# Altium PCB Transmitter.PcbDoc (part 2 of 2)
Units mm, origin at the board's own origin, x right, y up, seen from the top; angles counter-clockwise.
Board outline 94.9 x 125.8 mm, 2 copper layers (Top Layer, Bottom Layer); 250 components, 166 nets, 771 pads, 77 vias.
Unrouted connection lines stored in the file: 2.
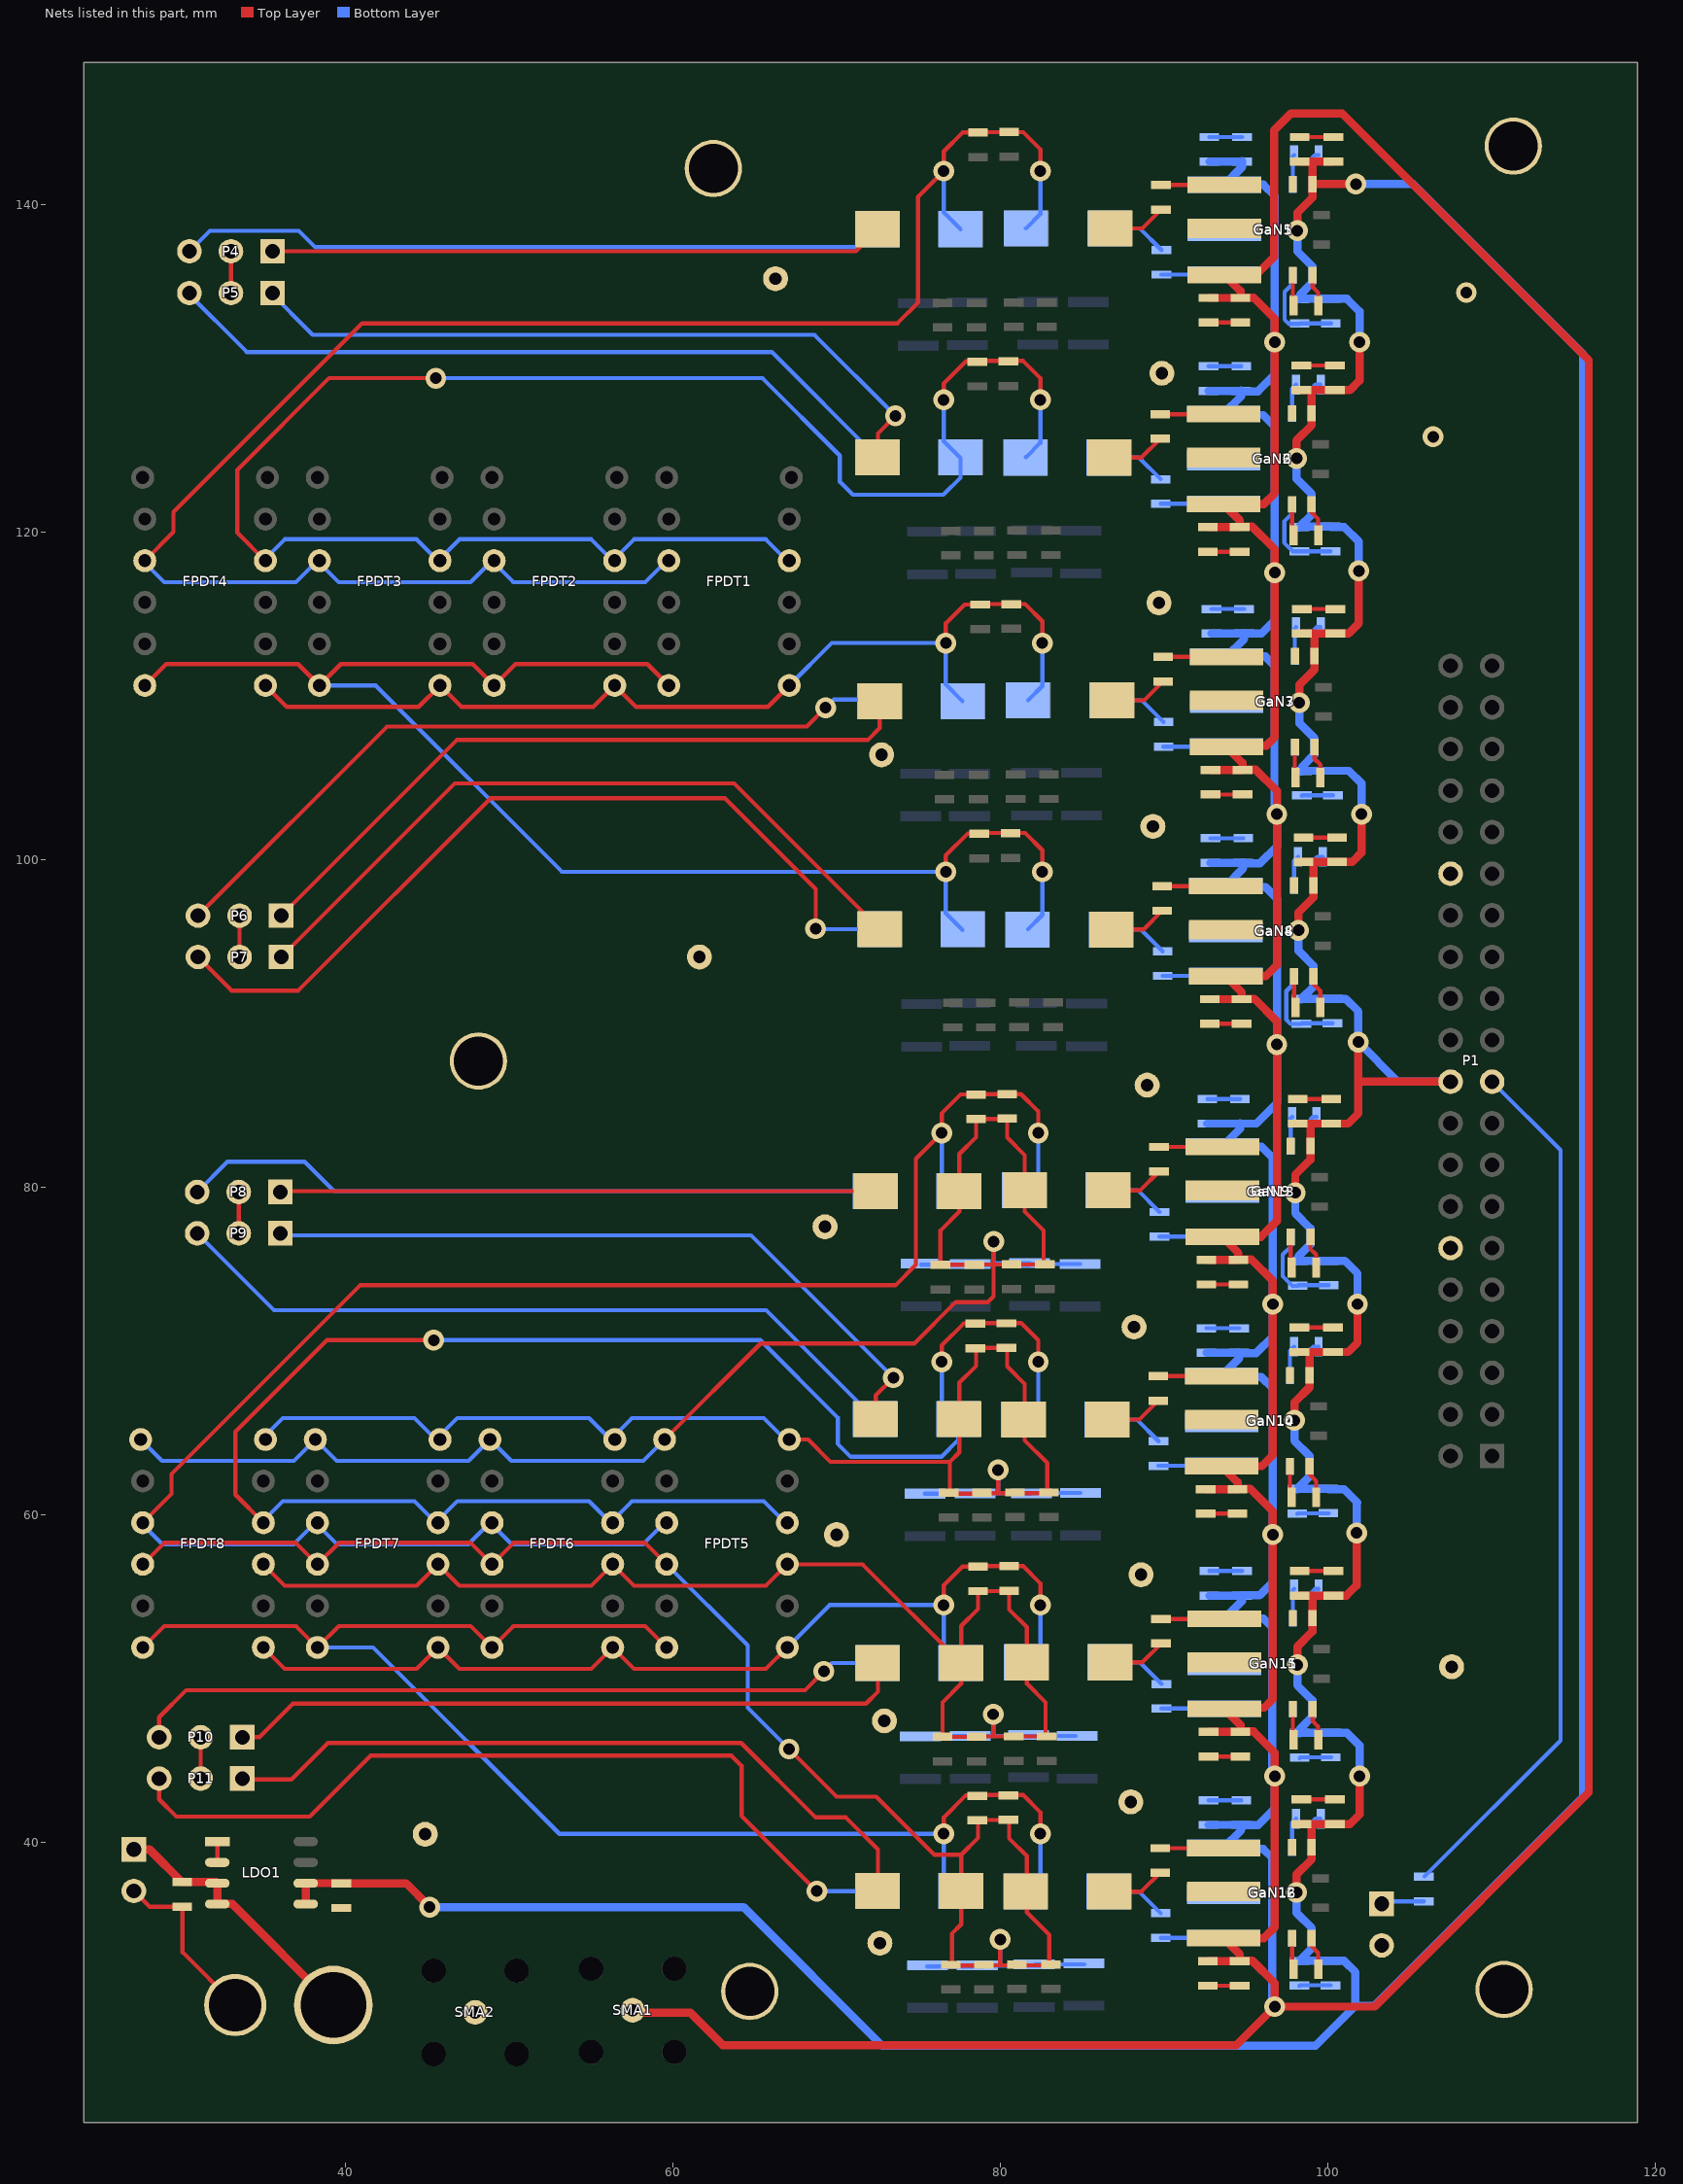
[diagram p2: the nets of this part, all layers, seen from the top]

## Via types
v1: diameter 1.27, hole 0.711, Top Layer to Bottom Layer, 77 vias

## Nets (pads, with @x,y where several pads share a name; then routed paths per layer and width w, separated by ;. In a path a pad name is that pad's centre, name@x,y a point inside that pad or via, vN(x,y) a via of type N, cw(c..) or ccw(c..) an arc to the next point about the centre after c; other vN are vias at no path point) (continued)
E5: Ca21.2 Ca22.2 Ca23.2 Ca24.2 Ca25.2 Cf21.2 Cf22.2 Cf23.2 Cf24.2 Cf25.2 FPDT5.1 FPDT6.1 FPDT7.1 FPDT8.1 L17.2 L18.1 | length 102.2
  Top Layer w0.254: FPDT5.1@59.473,64.582 65.341,70.45 74.725,70.45 77.25,72.975 79.225,72.975 79.575,73.325 79.575,75.275 ; L18.1@77.6,79.875 L18.1@77.475,79.75 ; Cf23.2@78.4,75.25 Ca23.2@76.325,75.25 76.325,77.35 77.475,78.5 L18.1@77.475,79.75 ; Cf23.2@78.85,75.275 79.575,75.275 ; v1(79.575,76.675) 79.575,75.275 ; Ca22.2@80.675,75.275 Cf22.2@82.625,75.275 ; Ca22.2@80.85,75.275 79.575,75.275 ; Cf22.2@82.7,75.275 Cf22.2@82.625,75.275 ; L18.1@77.475,79.75 77.475,82.025 78.5,83.05 Cf21.2@78.5,84.15 80.375,84.15 Ca21.2@80.4,84.175 80.4,83.025 81.475,81.95 L17.2@81.475,79.8 81.475,78.5 82.625,77.35 Cf22.2@82.625,75.275
  Bottom Layer w0.254: FPDT8.1@27.469,64.582 28.776,63.275 36.83,63.275 FPDT7.1@38.137,64.582 39.444,63.275 47.498,63.275 FPDT6.1@48.805,64.582 50.112,63.275 58.166,63.275 FPDT5.1@59.473,64.582 ; Cf25.2@75.15,75.25 78.349,75.25 Ca25.2@78.359,75.24 ; Ca25.2@78.934,75.24 79.575,75.24 ; v1(79.575,76.675) 79.575,75.24 ; Cf24.2@80.84,75.24 80.69,75.24 Cf24.2@80.7,75.25 ; Cf24.2@81.775,75.35 Cf24.2@80.8,75.35 ; Cf24.2@82.625,75.25 Cf24.2@82.65,75.275 ; Ca24.2@84.85,75.3 81.825,75.3 81.775,75.25 Cf24.2@80.7,75.25 ; 79.575,75.24 79.685,75.35 Cf24.2@80.8,75.35 ; Cf24.2@80.7,75.25 Cf24.2@80.8,75.35
E6: Ca26.2 Ca27.2 Ca28.2 Ca29.2 Ca30.2 Cf26.2 Cf27.2 Cf28.2 Cf29.2 Cf30.2 FPDT5.12 FPDT6.12 FPDT7.12 FPDT8.12 L19.2 L20.1 | length 87.4
  Top Layer w0.254: FPDT5.12@67.093,64.582 68.243,64.582 69.6,63.225 76.9,63.225 ; L20.1@77.475,65.825 L20.1@77.6,65.95 ; L20.1@77.6,65.9 L20.1@77.475,65.775 ; Cf27.2@78.85,61.3 79.85,61.3 ; Cf27.2@78.975,61.275 76.9,61.275 76.9,63.225 ; v1(79.85,62.725) 79.85,61.3 ; Ca28.2@80.825,61.3 82.85,61.3 82.85,63.15 81.475,64.525 81.475,67.975 80.4,69.05 80.4,70.2 80.375,70.175 78.5,70.175 78.5,69.075 77.475,68.05 L20.1@77.475,65.775 ; Ca28.2@80.85,61.3 79.85,61.3 ; 76.9,63.225 77.475,63.8 L20.1@77.475,65.775
  Bottom Layer w0.254: FPDT8.12@34.835,64.582 36.142,65.889 44.196,65.889 45.503,64.582 46.81,65.889 54.864,65.889 56.171,64.582 57.478,65.889 65.532,65.889 FPDT5.12@66.839,64.582 ; Cf30.2@75.375,61.275 Ca30.2@78.45,61.275 ; Ca30.2@78.934,61.265 78.924,61.275 Ca30.2@78.45,61.275 ; v1(79.85,62.725) 79.85,61.3 ; Cf29.2@80.84,61.265 80.85,61.275 81.875,61.275 81.925,61.325 Ca29.2@84.875,61.325 ; Cf29.2@81.875,61.3 79.85,61.3 ; Cf29.2@82.775,61.275 Cf29.2@82.8,61.3 ; Ca30.2@78.45,61.275 78.475,61.3 79.85,61.3
E7: Ca31.2 Ca32.2 Ca33.2 Ca34.2 Ca35.2 Cf31.2 Cf32.2 Cf33.2 Cf34.2 Cf35.2 FPDT5.9 FPDT6.9 FPDT7.9 FPDT8.9 L21.2 L22.1 | length 87.4
  Top Layer w0.254: FPDT8.9@34.962,56.962 36.269,55.655 44.323,55.655 FPDT7.9@45.63,56.962 46.937,55.655 54.991,55.655 FPDT6.9@56.298,56.962 57.605,55.655 65.659,55.655 FPDT5.9@66.966,56.962 71.563,56.962 L22.1@77.6,50.925 ; L22.1@77.725,51.05 L22.1@77.6,50.925 ; Cf33.2@78.525,46.425 Ca33.2@76.45,46.425 76.45,48.525 77.6,49.675 L22.1@77.6,50.925 ; Cf33.2@78.975,46.45 79.55,46.45 ; v1(79.55,47.8) 79.55,46.45 ; Ca32.2@80.8,46.45 Cf32.2@82.75,46.45 ; Ca32.2@80.975,46.45 79.55,46.45 ; Cf32.2@82.825,46.45 Cf32.2@82.75,46.45 ; L22.1@77.6,50.925 77.6,53.2 78.625,54.225 Cf31.2@78.625,55.325 80.5,55.325 Ca31.2@80.525,55.35 80.525,54.2 81.6,53.125 L21.2@81.6,50.975 81.6,49.675 82.75,48.525 Cf32.2@82.75,46.45
  Bottom Layer w0.254: Cf34.2@76.15,46.375 76.25,46.475 79.562,46.475 ; v1(79.55,47.8) 79.55,46.487 79.562,46.475 ; 79.562,46.45 79.562,46.475 ; Ca35.2@84.575,46.475 79.562,46.475
E8: Ca36.2 Ca37.2 Ca38.2 Ca39.2 Ca40.2 Cf36.2 Cf37.2 Cf38.2 Cf39.2 Cf40.2 FPDT5.4 FPDT6.4 FPDT7.4 FPDT8.4 L23.2 L24.1 | length 104.3
  Top Layer w0.254: FPDT8.4@27.596,56.962 28.903,58.269 36.957,58.269 FPDT7.4@38.264,56.962 39.571,58.269 47.625,58.269 FPDT6.4@48.932,56.962 50.239,58.269 58.293,58.269 FPDT5.4@59.6,56.962 ; v1(67.075,45.675) 69.975,42.775 72.4,42.775 75.95,39.225 77.6,39.225 ; L24.1@77.725,37.075 77.6,36.95 77.6,34.975 77.025,34.4 77.025,32.45 Cf37.2@79.1,32.45 ; L24.1@77.725,37.125 L24.1@77.6,37 77.6,39.225 ; Cf37.2@78.975,32.475 79.975,32.475 ; v1(79.975,34.05) 79.975,32.475 ; Ca38.2@80.95,32.475 82.975,32.475 82.975,34.325 81.6,35.7 81.6,39.15 80.525,40.225 80.525,41.375 80.5,41.35 78.625,41.35 78.625,40.25 77.6,39.225 ; Ca38.2@80.975,32.475 79.975,32.475
  Bottom Layer w0.254: FPDT5.4@59.6,56.962 64.55,52.012 64.55,48.2 v1(67.075,45.675) ; Cf39.2@75.525,32.4 78.875,32.4 Ca39.2@78.9,32.425 ; Ca39.2@79.059,32.44 80.012,32.44 ; v1(79.975,34.05) 79.975,32.477 80.012,32.44 ; Cf40.2@80.9,32.45 Cf40.2@82.05,32.45 ; Cf40.2@80.965,32.44 80.012,32.44 ; Cf40.2@82.974,32.45 Cf40.2@82.05,32.45 ; Ca40.2@85.1,32.525 82.125,32.525 Cf40.2@82.05,32.45
F1: Ca1.1 Cf1.1 FPDT1.3 FPDT2.3 FPDT3.3 FPDT4.3 L9.2 L10.1 | length 115.6
  Top Layer w0.254: FPDT4.3@27.721,118.252 29.475,120.006 29.475,121.225 41,132.75 73.7,132.75 74.95,134 74.95,140.475 v1(76.525,142.05) 76.525,143.25 77.675,144.4 Cf1.1@78.625,144.4 ; Cf1.1@78.625,144.425 Ca1.1@80.525,144.425 81.375,144.425 82.425,143.375 v1(82.425,142.05)
  Bottom Layer w0.254: FPDT4.3@27.594,118.252 28.901,116.945 36.955,116.945 38.262,118.252 39.569,116.945 47.623,116.945 48.93,118.252 50.237,116.945 58.291,116.945 FPDT1.3@59.598,118.252 ; v1(76.525,142.05) 76.525,139.525 L10.1@77.55,138.5 ; L9.2@81.55,138.55 82.425,139.425 v1(82.425,142.05)
F2: Ca6.1 Cf6.1 FPDT1.10 FPDT2.10 FPDT3.10 FPDT4.10 L11.2 L12.1 | length 110.6
  Top Layer w0.254: FPDT4.10@35.087,118.252 33.375,119.964 33.375,123.8 38.975,129.4 v1(45.5,129.4) ; v1(76.525,128.075) 76.525,129.075 77.875,130.425 Cf6.1@78.625,130.425 ; Cf6.1@78.625,130.45 81.375,130.45 82.425,129.4 v1(82.425,128.075)
  Bottom Layer w0.254: FPDT4.10@34.96,118.252 36.267,119.559 44.321,119.559 45.628,118.252 46.935,119.559 54.989,119.559 56.296,118.252 57.603,119.559 65.657,119.559 FPDT1.10@66.964,118.252 ; v1(45.5,129.4) 65.45,129.4 70.175,124.675 70.175,123.075 70.975,122.275 76.5,122.275 77.55,123.325 77.55,124.525 76.525,125.55 v1(76.525,128.075) ; L11.2@81.55,124.575 82.425,125.45 v1(82.425,128.075)
F3: Ca11.1 Cf11.1 FPDT1.7 FPDT2.7 FPDT3.7 FPDT4.7 L13.2 L14.1 | length 63.1
  Top Layer w0.254: FPDT4.7@35.087,110.632 36.394,109.325 44.448,109.325 FPDT3.7@45.755,110.632 47.062,109.325 55.116,109.325 FPDT2.7@56.423,110.632 57.73,109.325 65.784,109.325 FPDT1.7@67.091,110.632 ; v1(76.65,113.225) 76.65,114.425 77.8,115.575 Cf11.1@78.75,115.575 ; Cf11.1@78.75,115.6 Ca11.1@80.65,115.6 81.5,115.6 82.55,114.55 v1(82.55,113.225)
  Bottom Layer w0.254: FPDT1.7@67.091,110.632 69.684,113.225 v1(76.65,113.225) 76.65,110.7 L14.1@77.675,109.675 ; L13.2@81.675,109.725 82.55,110.6 v1(82.55,113.225)
F4: Ca16.1 Cf16.1 FPDT1.6 FPDT2.6 FPDT3.6 FPDT4.6 L15.2 L16.1 | length 95.3
  Top Layer w0.254: FPDT4.6@27.721,110.632 29.028,111.939 37.082,111.939 FPDT3.6@38.389,110.632 39.696,111.939 47.75,111.939 FPDT2.6@49.057,110.632 50.364,111.939 58.418,111.939 FPDT1.6@59.725,110.632 ; v1(76.65,99.25) 76.65,100.25 78,101.6 Cf16.1@78.75,101.6 ; Cf16.1@78.75,101.625 81.5,101.625 82.55,100.575 v1(82.55,99.25)
  Bottom Layer w0.254: FPDT3.6@38.389,110.632 41.825,110.632 53.207,99.25 v1(76.65,99.25) 76.65,96.725 L16.1@77.675,95.7 ; L15.2@81.675,95.75 82.55,96.625 v1(82.55,99.25)
F5: Ca21.1 Cf21.1 FPDT5.3 FPDT6.3 FPDT7.3 FPDT8.3 L25.2 L26.1 | length 115.6
  Top Layer w0.254: FPDT8.3@27.596,59.502 29.35,61.256 29.35,62.475 40.875,74 73.575,74 74.825,75.25 74.825,81.725 v1(76.4,83.3) 76.4,84.5 77.55,85.65 Cf21.1@78.5,85.65 ; Cf21.1@78.5,85.675 Ca21.1@80.4,85.675 81.25,85.675 82.3,84.625 v1(82.3,83.3)
  Bottom Layer w0.254: FPDT8.3@27.469,59.502 28.776,58.195 36.83,58.195 38.137,59.502 39.444,58.195 47.498,58.195 48.805,59.502 50.112,58.195 58.166,58.195 FPDT5.3@59.473,59.502 ; v1(76.4,83.3) 76.4,80.775 L26.1@77.425,79.75 ; L25.2@81.425,79.8 82.3,80.675 v1(82.3,83.3)
F6: Ca26.1 Cf26.1 FPDT5.10 FPDT6.10 FPDT7.10 FPDT8.10 L27.2 L28.1 | length 110.6
  Top Layer w0.254: FPDT8.10@34.962,59.502 33.25,61.214 33.25,65.05 38.85,70.65 v1(45.375,70.65) ; v1(76.4,69.325) 76.4,70.325 77.75,71.675 Cf26.1@78.5,71.675 ; Cf26.1@78.5,71.7 81.25,71.7 82.3,70.65 v1(82.3,69.325)
  Bottom Layer w0.254: FPDT8.10@34.835,59.502 36.142,60.809 44.196,60.809 45.503,59.502 46.81,60.809 54.864,60.809 56.171,59.502 57.478,60.809 65.532,60.809 FPDT5.10@66.839,59.502 ; v1(45.375,70.65) 65.325,70.65 70.05,65.925 70.05,64.325 70.85,63.525 76.375,63.525 77.425,64.575 77.425,65.775 76.4,66.8 v1(76.4,69.325) ; L27.2@81.425,65.825 82.3,66.7 v1(82.3,69.325)
F7: Ca31.1 Cf31.1 FPDT5.7 FPDT6.7 FPDT7.7 FPDT8.7 L29.2 L30.1 | length 63.1
  Top Layer w0.254: FPDT8.7@34.962,51.882 36.269,50.575 44.323,50.575 FPDT7.7@45.63,51.882 46.937,50.575 54.991,50.575 FPDT6.7@56.298,51.882 57.605,50.575 65.659,50.575 FPDT5.7@66.966,51.882 ; v1(76.525,54.475) 76.525,55.675 77.675,56.825 Cf31.1@78.625,56.825 ; Cf31.1@78.625,56.85 Ca31.1@80.525,56.85 81.375,56.85 82.425,55.8 v1(82.425,54.475)
  Bottom Layer w0.254: FPDT5.7@66.966,51.882 69.559,54.475 v1(76.525,54.475) 76.525,51.95 L30.1@77.55,50.925 ; L29.2@81.55,50.975 82.425,51.85 v1(82.425,54.475)
F8: Ca36.1 Cf36.1 FPDT5.6 FPDT6.6 FPDT7.6 FPDT8.6 L31.2 L32.1 | length 95.3
  Top Layer w0.254: FPDT8.6@27.596,51.882 28.903,53.189 36.957,53.189 FPDT7.6@38.264,51.882 39.571,53.189 47.625,53.189 FPDT6.6@48.932,51.882 50.239,53.189 58.293,53.189 FPDT5.6@59.6,51.882 ; v1(76.525,40.5) 76.525,41.5 77.875,42.85 Cf36.1@78.625,42.85 ; Cf36.1@78.625,42.875 81.375,42.875 82.425,41.825 v1(82.425,40.5)
  Bottom Layer w0.254: FPDT7.6@38.264,51.882 41.668,51.882 53.05,40.5 v1(76.525,40.5) 76.525,37.975 L32.1@77.55,36.95 ; L31.2@81.55,37 82.425,37.875 v1(82.425,40.5)
GND: C1.2 C2.2 C7.1 C8.2 C9.1 C10.1 C11.1 C12.2 C13.1 C14.1 C15.1 C16.2 C17.1 C18.1 C19.1 C20.2 C21.1 C22.1 C27.1 C28.2 C29.1 C30.1 C31.1 C32.2 C33.1 C34.1 C35.1 C36.2 C37.1 C38.1 C39.1 C40.2 C41.1 C42.1 C47.1 C48.2 C49.1 C50.1 C51.1 C52.2 C53.1 C54.1 C55.1 C56.2 C57.1 C58.1 C59.1 C60.2 C61.1 C62.1 C67.1 C68.2 C69.1 C70.1 C71.1 C72.2 C73.1 C74.1 C75.1 C76.2 C77.1 C78.1 C79.1 C80.2 C81.1 C82.1 D1.2 GaN1.7 GaN1.9 GaN2.7 GaN2.9 GaN3.7 GaN3.9 GaN4.7 GaN4.9 GaN5.7 GaN5.9 GaN6.7 GaN6.9 GaN7.7 GaN7.9 GaN8.7 GaN8.9 GaN9.7 GaN9.9 GaN10.7 GaN10.9 GaN11.7 GaN11.9 GaN12.7 GaN12.9 GaN13.7 GaN13.9 GaN14.7 GaN14.9 GaN15.7 GaN15.9 GaN16.7 GaN16.9 LDO1.1 LDO1.2 P1.12 P1.30 P2.2 P3.2 P4.2 P5.2 P6.2 P7.2 P8.2 P9.2 P10.2 P11.2 pad.0 pad.1 pad.2 pad.3 pad.4 pad.5 pad.6 pad.7 pad.8 pad.9 pad.10 pad.11 pad.12 pad.13 pad.14 pad.15 SMA2.1 | length 100.6
  Top Layer w0.254: P3.2@27.05,37.01 28.01,36.05 C1.2@30,36.05 30.025,36.025 30.025,33.265 P2.2@33.243,30.047 ; P11.2@31.135,43.875 P10.2@31.135,46.4 ; LDO1.2@32.15,38.755 LDO1.1@32.15,40.025 ; P5.2@32.985,134.6 P4.2@32.985,137.15 ; P9.2@33.46,77.175 P8.2@33.46,79.7 ; P7.2@33.51,94.05 P6.2@33.51,96.575 ; C53.1@92.525,60.05 C54.1@94.475,60.05 ; C49.1@92.575,74.05 C50.1@94.525,74.05 ; C61.1@92.65,31.225 C62.1@94.6,31.225 ; C13.1@92.65,118.8 C14.1@94.6,118.8 ; C57.1@92.7,45.225 C58.1@94.65,45.225 ; C9.1@92.7,132.8 C10.1@94.65,132.8 ; C21.1@92.775,89.975 C22.1@94.725,89.975 ; C17.1@92.825,103.975 C18.1@94.775,103.975 ; C48.2@98.15,85.375 C47.1@100.2,85.375 ; C52.2@98.25,71.425 C51.1@100.3,71.425 ; C56.2@98.275,56.55 C55.1@100.325,56.55 ; C8.2@98.275,144.125 C7.1@100.325,144.125 ; C60.2@98.375,42.6 C59.1@100.425,42.6 ; C12.2@98.375,130.175 C11.1@100.425,130.175 ; C16.2@98.4,115.3 C15.1@100.45,115.3 ; C20.2@98.5,101.35 C19.1@100.55,101.35
  Bottom Layer w0.254: C73.1@92.575,71.375 C74.1@94.575,71.375 ; C69.1@92.625,85.375 C70.1@94.625,85.375 ; C81.1@92.7,42.55 C82.1@94.7,42.55 ; C33.1@92.7,130.125 C34.1@94.7,130.125 ; C29.1@92.75,144.125 C30.1@94.75,144.125 ; C77.1@92.75,56.55 C78.1@94.75,56.55 ; C41.1@92.825,101.3 C42.1@94.825,101.3 ; C37.1@92.875,115.3 C38.1@94.875,115.3 ; GaN13.7@97.725,76.925 97.725,76.375 97.225,75.875 97.225,74.56 97.823,73.962 98.148,73.962 98.186,74 C67.1@100.05,74 ; GaN6.7@97.8,121.675 97.8,121.129 97.325,120.654 97.325,119.35 97.85,118.825 C31.1@100.15,118.825 ; GaN5.7@97.85,135.675 97.85,135.172 97.35,134.672 97.35,132.975 97.613,132.712 98.273,132.712 98.311,132.75 C27.1@100.175,132.75 ; GaN8.7@97.925,92.85 97.925,92.438 97.45,91.963 97.45,90.225 97.713,89.962 98.373,89.962 98.411,90 C39.1@100.275,90 ; C72.2@98.123,60.037 98.161,60.075 C71.1@100.025,60.075 ; C80.2@98.248,31.212 98.286,31.25 C79.1@100.15,31.25 ; C76.2@98.273,45.137 98.311,45.175 C75.1@100.175,45.175 ; C36.2@98.398,103.887 98.436,103.925 C35.1@100.3,103.925
  other v1: 106.425,125.825 108.45,134.625
LED: P1.19 R1.1 | length 53.7
  Bottom Layer w0.254: R1.1@105.9,37.9 114.2,46.2 114.2,82.26 P1.19@110.025,86.435
NetC3_1: C3.1 GaN1.2 | length 1.9
  Top Layer w0.254: GaN1.2@97.85,135.7 97.85,133.875 C3.1@97.9,133.825
NetC3_2: C3.2 GaN1.3 | length 2
  Top Layer w0.254: GaN1.3@99.05,135.7 99.05,134.975 99.4,134.625 C3.2@99.4,133.825
NetC4_1: C4.1 GaN2.2 | length 1.9
  Top Layer w0.254: GaN2.2@97.8,121.7 97.8,119.9 C4.1@97.9,119.8
NetC4_2: C4.2 GaN2.3 | length 2.1
  Top Layer w0.254: GaN2.3@99,121.7 99,121.2 99.4,120.8 C4.2@99.4,119.8
NetC5_1: C5.1 GaN3.2 | length 1.9
  Top Layer w0.254: GaN3.2@97.975,106.875 97.975,105.05 C5.1@98.025,105
NetC5_2: C5.2 GaN3.3 | length 2
  Top Layer w0.254: GaN3.3@99.175,106.875 99.175,106.15 99.525,105.8 C5.2@99.525,105
NetC6_1: C6.1 GaN4.2 | length 1.9
  Top Layer w0.254: GaN4.2@97.925,92.875 97.925,91.075 C6.1@98.025,90.975
NetC6_2: C6.2 GaN4.3 | length 2.1
  Top Layer w0.254: GaN4.3@99.125,92.875 99.125,92.375 99.525,91.975 C6.2@99.525,90.975
NetC23_1: C23.1 GaN5.2 | length 1.8
  Bottom Layer w0.254: GaN5.2@97.85,141.225 97.85,142.95 C23.1@97.925,143.025
NetC23_2: C23.2 GaN5.3 | length 2.1
  Bottom Layer w0.254: GaN5.3@99.05,141.225 99.05,142.875 99.2,143.025 C23.2@99.425,143.025
NetC24_1: C24.1 GaN6.2 | length 1.9
  Bottom Layer w0.254: GaN6.2@97.8,127.225 97.8,128.75 C24.1@98.05,129
NetC24_2: C24.2 GaN6.3 | length 2.2
  Bottom Layer w0.254: GaN6.3@99,127.225 99,128.775 99.225,129 C24.2@99.55,129
NetC25_1: C25.1 GaN7.2 | length 1.8
  Bottom Layer w0.254: GaN7.2@97.975,112.4 97.975,114.125 C25.1@98.05,114.2
NetC25_2: C25.2 GaN7.3 | length 2.1
  Bottom Layer w0.254: GaN7.3@99.175,112.4 99.175,114.05 99.325,114.2 C25.2@99.55,114.2
NetC26_1: C26.1 GaN8.2 | length 1.9
  Bottom Layer w0.254: GaN8.2@97.925,98.4 97.925,99.925 C26.1@98.175,100.175
NetC26_2: C26.2 GaN8.3 | length 2.2
  Bottom Layer w0.254: GaN8.3@99.125,98.4 99.125,99.95 99.35,100.175 C26.2@99.675,100.175
NetC43_1: C43.1 GaN9.2 | length 1.9
  Top Layer w0.254: GaN9.2@97.725,76.95 97.725,75.125 C43.1@97.775,75.075
NetC43_2: C43.2 GaN9.3 | length 2
  Top Layer w0.254: GaN9.3@98.925,76.95 98.925,76.225 99.275,75.875 C43.2@99.275,75.075
NetC44_1: C44.1 GaN10.2 | length 1.9
  Top Layer w0.254: GaN10.2@97.675,62.95 97.675,61.15 C44.1@97.775,61.05
NetC44_2: C44.2 GaN10.3 | length 2.1
  Top Layer w0.254: GaN10.3@98.875,62.95 98.875,62.45 99.275,62.05 C44.2@99.275,61.05
NetC45_1: C45.1 GaN11.2 | length 1.9
  Top Layer w0.254: GaN11.2@97.85,48.125 97.85,46.3 C45.1@97.9,46.25
NetC45_2: C45.2 GaN11.3 | length 2
  Top Layer w0.254: GaN11.3@99.05,48.125 99.05,47.4 99.4,47.05 C45.2@99.4,46.25
NetC46_1: C46.1 GaN12.2 | length 1.9
  Top Layer w0.254: GaN12.2@97.8,34.125 97.8,32.325 C46.1@97.9,32.225
NetC46_2: C46.2 GaN12.3 | length 2.1
  Top Layer w0.254: GaN12.3@99,34.125 99,33.625 99.4,33.225 C46.2@99.4,32.225
NetC63_1: C63.1 GaN13.2 | length 1.8
  Bottom Layer w0.254: GaN13.2@97.725,82.475 97.725,84.2 C63.1@97.8,84.275
NetC63_2: C63.2 GaN13.3 | length 2.1
  Bottom Layer w0.254: GaN13.3@98.925,82.475 98.925,84.125 99.075,84.275 C63.2@99.3,84.275
NetC64_1: C64.1 GaN14.2 | length 1.9
  Bottom Layer w0.254: GaN14.2@97.675,68.475 97.675,70 C64.1@97.925,70.25
NetC64_2: C64.2 GaN14.3 | length 2.2
  Bottom Layer w0.254: GaN14.3@98.875,68.475 98.875,70.025 99.1,70.25 C64.2@99.425,70.25
NetC65_1: C65.1 GaN15.2 | length 1.8
  Bottom Layer w0.254: GaN15.2@97.85,53.65 97.85,55.375 C65.1@97.925,55.45
NetC65_2: C65.2 GaN15.3 | length 2.1
  Bottom Layer w0.254: GaN15.3@99.05,53.65 99.05,55.3 99.2,55.45 C65.2@99.425,55.45
NetC66_1: C66.1 GaN16.2 | length 1.9
  Bottom Layer w0.254: GaN16.2@97.8,39.65 97.8,41.175 C66.1@98.05,41.425
NetC66_2: C66.2 GaN16.3 | length 2.2
  Bottom Layer w0.254: GaN16.3@99,39.65 99,41.2 99.225,41.425 C66.2@99.55,41.425
NetD1_1: D1.1 R1.2 | length 2.6
  Bottom Layer w0.254: D1.1@103.275,36.225 103.425,36.375 R1.2@105.85,36.375
NetGaN1_8: GaN1.8 R2.1 | length 3.9
  Top Layer w0.254: R2.1@89.8,141.2 GaN1.8@93.675,141.2
NetGaN2_8: GaN2.8 R3.1 | length 3.9
  Top Layer w0.254: R3.1@89.75,127.2 GaN2.8@93.625,127.2
NetGaN3_8: GaN3.8 R4.1 | length 3.9
  Top Layer w0.254: R4.1@89.925,112.375 GaN3.8@93.8,112.375
NetGaN4_8: GaN4.8 R5.1 | length 3.9
  Top Layer w0.254: R5.1@89.875,98.375 GaN4.8@93.75,98.375
NetGaN5_8: GaN5.8 R6.1 | length 3.9
  Bottom Layer w0.254: R6.1@89.825,135.725 GaN5.8@93.675,135.725
NetGaN6_8: GaN6.8 R7.1 | length 3.9
  Bottom Layer w0.254: R7.1@89.775,121.725 GaN6.8@93.625,121.725
NetGaN7_8: GaN7.8 R8.1 | length 3.9
  Bottom Layer w0.254: R8.1@89.95,106.9 GaN7.8@93.8,106.9
NetGaN8_8: GaN8.8 R9.1 | length 3.9
  Bottom Layer w0.254: R9.1@89.9,92.9 GaN8.8@93.75,92.9
NetGaN9_8: GaN9.8 R10.1 | length 3.9
  Top Layer w0.254: R10.1@89.675,82.45 GaN9.8@93.55,82.45
NetGaN10_8: GaN10.8 R11.1 | length 3.9
  Top Layer w0.254: R11.1@89.625,68.45 GaN10.8@93.5,68.45
NetGaN11_8: GaN11.8 R12.1 | length 3.9
  Top Layer w0.254: R12.1@89.8,53.625 GaN11.8@93.675,53.625
NetGaN12_8: GaN12.8 R13.1 | length 3.9
  Top Layer w0.254: R13.1@89.75,39.625 GaN12.8@93.625,39.625
NetGaN13_8: GaN13.8 R14.1 | length 3.9
  Bottom Layer w0.254: R14.1@89.7,76.975 GaN13.8@93.55,76.975
NetGaN14_8: GaN14.8 R15.1 | length 3.9
  Bottom Layer w0.254: R15.1@89.65,62.975 GaN14.8@93.5,62.975
NetGaN15_8: GaN15.8 R16.1 | length 3.9
  Bottom Layer w0.254: R16.1@89.825,48.15 GaN15.8@93.675,48.15
NetGaN16_8: GaN16.8 R17.1 | length 3.9
  Bottom Layer w0.254: R17.1@89.775,34.15 GaN16.8@93.625,34.15
NetL1_1: L1.1 R2.2 | length 3.6
  Top Layer w0.254: L1.1@86.7,138.55 88.65,138.55 R2.2@89.8,139.7
NetL2_2: L2.2 P4.1 | length 37.5
  Top Layer w0.254: P4.1@35.525,137.15 71.15,137.15 L2.2@72.5,138.5
NetL3_1: L3.1 R3.2 | length 3.6
  Top Layer w0.254: L3.1@86.65,124.55 88.6,124.55 R3.2@89.75,125.7
NetL4_2: L4.2 P5.1 | length 44.5
  Top Layer w0.254: L4.2@72.5,124.575 72.5,126.025 v1(73.575,127.1)
  Bottom Layer w0.254: P5.1@35.25,134.775 37.975,132.05 68.625,132.05 v1(73.575,127.1)
NetL5_1: L5.1 R4.2 | length 3.6
  Top Layer w0.254: L5.1@86.825,109.725 88.775,109.725 R4.2@89.925,110.875
NetL6_2: L6.2 P6.1 | length 43
  Top Layer w0.254: P6.1@36.05,96.575 46.775,107.3 71.88,107.3 72.605,108.025 L6.2@72.605,109.775
NetL7_1: L7.1 R5.2 | length 3.6
  Top Layer w0.254: L7.1@86.775,95.725 88.725,95.725 R5.2@89.875,96.875
NetL8_2: L8.2 P7.1 | length 44.7
  Top Layer w0.254: P7.1@36.05,94.05 46.65,104.65 63.725,104.65 L8.2@72.625,95.75
NetL9_1: L9.1 R6.2 | length 3.7
  Bottom Layer w0.254: L9.1@86.65,138.55 88.5,138.55 R6.2@89.825,137.225
NetL10_2: L10.2 P4.3 | length 43.6
  Bottom Layer w0.254: P4.3@30.445,137.395 P4.3@30.445,137.15 31.695,138.4 37.125,138.4 38.13,137.395 71.345,137.395 L10.2@72.45,138.5
NetL11_1: L11.1 R7.2 | length 3.7
  Bottom Layer w0.254: L11.1@86.6,124.55 88.45,124.55 R7.2@89.775,123.225
NetL12_2: L12.2 P5.3 | length 46.5
  Bottom Layer w0.254: P5.3@30.17,134.775 33.945,131 66.025,131 L12.2@72.45,124.575
NetL13_1: L13.1 R8.2 | length 3.7
  Bottom Layer w0.254: L13.1@86.775,109.725 88.625,109.725 R8.2@89.95,108.4
NetL14_2: L14.2 P6.3 | length 46.3
  Top Layer w0.254: P6.3@30.97,96.575 42.52,108.125 68.155,108.125 v1(69.305,109.275)
  Bottom Layer w0.254: 69.805,109.775 L14.2@72.555,109.775
NetL15_1: L15.1 R9.2 | length 3.7
  Bottom Layer w0.254: L15.1@86.725,95.725 88.575,95.725 R9.2@89.9,94.4
NetL16_2: L16.2 P7.3 | length 52.1
  Top Layer w0.254: P7.3@30.97,94.05 33.02,92 37.1,92 48.85,103.75 63.15,103.75 68.7,98.2 v1(68.7,95.775)
  Bottom Layer w0.254: v1(68.7,95.775) 68.725,95.75 L16.2@72.575,95.75
NetL17_1: L17.1 R10.2 | length 3.6
  Top Layer w0.254: L17.1@86.575,79.8 88.525,79.8 R10.2@89.675,80.95
NetL18_2: L18.2 P8.1 | length 36.4
  Top Layer w0.254: P8.1@36,79.75 L18.2@72.375,79.75
NetL19_1: L19.1 R11.2 | length 3.6
  Top Layer w0.254: L19.1@86.525,65.8 88.475,65.8 R11.2@89.625,66.95
NetL20_2: L20.2 P9.1 | length 44.7
  Top Layer w0.254: L20.2@72.375,65.825 72.375,67.275 v1(73.45,68.35)
  Bottom Layer w0.254: P9.1@36,77.05 64.75,77.05 v1(73.45,68.35) ; P9.1@36,77.175 P9.1@36.5,76.675
NetL21_1: L21.1 R12.2 | length 3.6
  Top Layer w0.254: L21.1@86.7,50.975 88.65,50.975 R12.2@89.8,52.125
NetL22_2: L22.2 P10.1 | length 41.7
  Top Layer w0.254: P10.1@33.675,46.4 34.725,46.4 36.775,48.45 71.775,48.45 72.5,49.175 L22.2@72.5,50.925
NetL23_1: L23.1 R13.2 | length 3.6
  Top Layer w0.254: L23.1@86.65,36.975 88.6,36.975 R13.2@89.75,38.125
NetL24_2: L24.2 P11.1 | length 45
  Top Layer w0.254: P11.1@33.675,43.825 36.675,43.825 38.9,46.05 64.15,46.05 68.7,41.5 70.55,41.5 72.5,39.55 L24.2@72.5,37
NetL25_1: L25.1 R14.2 | length 3.7
  Bottom Layer w0.254: L25.1@86.525,79.8 88.375,79.8 R14.2@89.7,78.475
NetL26_2: L26.2 P8.3 | length 42.9
  Bottom Layer w0.254: P8.3@30.92,79.7 32.77,81.55 37.475,81.55 39.275,79.75 L26.2@72.325,79.75
NetL27_1: L27.1 R15.2 | length 3.7
  Bottom Layer w0.254: L27.1@86.475,65.8 88.325,65.8 R15.2@89.65,64.475
NetL28_2: L28.2 P9.3 | length 46.1
  Bottom Layer w0.254: P9.3@30.92,77.175 35.62,72.475 65.675,72.475 L28.2@72.325,65.825
NetL29_1: L29.1 R16.2 | length 3.7
  Bottom Layer w0.254: L29.1@86.65,50.975 88.5,50.975 R16.2@89.825,49.65
NetL30_2: L30.2 P10.3 | length 46.6
  Top Layer w0.254: P10.3@28.595,46.4 28.595,47.62 30.25,49.275 68.05,49.275 v1(69.2,50.425)
  Bottom Layer w0.254: v1@69.4,50.425 v1(69.2,50.425) 69.7,50.925 L30.2@72.45,50.925
NetL31_1: L31.1 R17.2 | length 3.7
  Bottom Layer w0.254: L31.1@86.6,36.975 88.45,36.975 R17.2@89.775,35.65
NetL32_2: L32.2 P11.3 | length 52.3
  Top Layer w0.254: P11.3@28.595,43.825 28.595,42.605 29.65,41.55 37.8,41.55 41.525,45.275 63.55,45.275 64.175,44.65 64.175,41.6 v1(68.775,37)
  Bottom Layer w0.254: v1(68.775,37) L32.2@72.45,37
V_BAT: C1.1 LDO1.3 LDO1.4 P2.1 P3.1 | length 17.8
  Top Layer w0.254: P2.1@38.318,30.047 P2.1@39.243,30.047
  Top Layer w0.5: P3.1@27.05,39.55 28,39.55 C1.1@30,37.55 32.085,37.55 LDO1.3@32.15,37.485 LDO1.4@32.15,36.215 33.075,36.215 P2.1@39.243,30.047
VCC: C2.1 C7.2 C8.1 C11.2 C12.1 C15.2 C16.1 C19.2 C20.1 C27.2 C28.1 C31.2 C32.1 C35.2 C36.1 C39.2 C40.1 C47.2 C48.1 C51.2 C52.1 C55.2 C56.1 C59.2 C60.1 C67.2 C68.1 C71.2 C72.1 C75.2 C76.1 C79.2 C80.1 GaN1.6 GaN2.6 GaN3.6 GaN4.6 GaN5.6 GaN6.6 GaN7.6 GaN8.6 GaN9.6 GaN10.6 GaN11.6 GaN12.6 GaN13.6 GaN14.6 GaN15.6 GaN16.6 LDO1.5 LDO1.6 P1.20 | length 381.1
  Top Layer w0.5: LDO1.5@37.55,36.215 LDO1.6@37.55,37.485 C2.1@39.76,37.485 ; C2.1@39.725,37.475 43.675,37.475 v1(45.125,36.025) ; v1(97.95,65.75) 97.95,66.85 98.875,67.775 98.875,69.825 ; v1(98,79.65) 98,80.75 98.925,81.675 GaN9.6@98.925,82.5 98.925,83.825 ; v1(98.075,36.925) 98.075,38.025 99,38.95 99,41 ; v1(98.075,124.5) 98.075,125.6 99,126.525 99,128.575 ; v1(98.125,50.825) 98.125,51.925 99.05,52.85 GaN11.6@99.05,53.675 99.05,55 ; v1(98.125,138.4) 98.125,139.5 99.05,140.425 GaN1.6@99.05,141.25 ; C48.1@98.15,83.875 C47.2@100.2,83.875 101.225,83.875 101.85,84.5 101.85,86.4 ; v1(98.2,95.675) 98.2,96.775 99.125,97.7 99.125,99.75 ; C52.1@98.25,69.925 C51.2@100.3,69.925 101.225,69.925 101.8,70.5 v1(101.8,72.85) ; v1(98.25,109.575) 98.25,110.675 99.175,111.6 GaN3.6@99.175,112.425 99.175,113.75 ; C56.1@98.275,55.05 C55.2@100.325,55.05 ; C8.1@98.275,142.625 C7.2@100.325,142.625 ; C60.1@98.375,41.1 C59.2@100.425,41.1 101.35,41.1 101.925,41.675 v1(101.925,44.025) ; C12.1@98.375,128.675 C11.2@100.425,128.675 101.35,128.675 101.925,129.25 v1(101.925,131.6) ; C16.1@98.4,113.8 C15.2@100.45,113.8 ; C20.1@98.5,99.85 C19.2@100.55,99.85 101.475,99.85 102.05,100.425 v1(102.05,102.775) ; 99.05,142.575 GaN1.6@99.05,141.25 ; C55.2@100.3,55.05 101.125,55.05 101.75,55.675 v1(101.75,58.875) ; C15.2@100.425,113.8 101.25,113.8 101.875,114.425 v1(101.875,117.625) ; v1(101.7,141.25) GaN1.6@99.05,141.25 ; v1(101.85,88.85) 101.85,86.4 ; P1.20@107.485,86.435 101.885,86.435 101.85,86.4
  Bottom Layer w0.5: v1(45.125,36.025) 64.3,36.025 72.775,27.55 99.225,27.55 101.675,30 ; v1(97.95,65.75) 97.95,64.5 98.875,63.575 GaN14.6@98.875,63.025 ; v1(98,79.65) 98,78.4 98.925,77.475 GaN13.6@98.925,76.925 98.925,76.5 98.186,75.761 C68.1@98.186,75.5 ; v1(98.075,36.925) 98.075,35.675 99,34.75 GaN16.6@99,34.2 ; v1(98.075,124.5) 98.075,123.25 99,122.325 GaN6.6@99,121.775 ; C72.1@98.123,61.537 98.161,61.575 C71.2@100.025,61.575 ; C72.1@98.123,61.562 98.123,61.573 98.875,62.325 GaN14.6@98.875,62.925 ; v1(98.125,50.825) 98.125,49.575 99.05,48.65 GaN15.6@99.05,48.1 99.05,47.675 98.311,46.936 C76.1@98.311,46.675 ; v1(98.125,138.4) 98.125,137.15 99.05,136.225 GaN5.6@99.05,135.675 99.05,135.25 98.311,134.511 C28.1@98.311,134.25 ; C68.1@98.148,75.462 C68.1@98.186,75.5 ; v1(98.2,95.675) 98.2,94.425 99.125,93.5 GaN8.6@99.125,92.95 ; C80.1@98.248,32.712 98.286,32.75 C79.2@100.15,32.75 100.975,32.75 101.675,32.05 101.675,30 ; C80.1@98.248,32.737 98.248,32.748 99,33.5 GaN16.6@99,34.1 ; C32.1@98.248,120.287 98.286,120.325 C31.2@100.15,120.325 ; C32.1@98.248,120.312 98.248,120.323 99,121.075 GaN6.6@99,121.675 ; v1(98.25,109.575) 98.25,108.325 99.175,107.4 GaN7.6@99.175,106.85 99.175,106.425 98.436,105.686 C36.1@98.436,105.425 ; C76.1@98.273,46.637 C76.1@98.311,46.675 ; C28.1@98.273,134.212 C28.1@98.311,134.25 ; C40.1@98.373,91.462 98.411,91.5 C39.2@100.275,91.5 ; C40.1@98.373,91.487 98.373,91.498 99.125,92.25 GaN8.6@99.125,92.85 ; C36.1@98.398,105.387 C36.1@98.436,105.425 ; C71.2@100.05,61.55 100.975,61.55 101.8,60.725 101.75,60.675 v1(101.75,58.875) ; C39.2@100.1,91.5 101.075,91.5 101.85,90.725 v1(101.85,88.85) 104.265,86.435 P1.20@107.485,86.435 ; C31.2@100.175,120.3 101,120.3 101.875,119.425 v1(101.875,117.625) ; v1(101.7,141.25) 105.2,141.25 115.575,130.875 115.575,42.725 102.85,30 101.675,30 ; v1(101.8,72.85) 101.8,74.725 101.025,75.5 C67.2@100.05,75.5 C68.1@98.186,75.5 ; v1(101.925,44.025) 101.925,45.9 101.15,46.675 C75.2@100.175,46.675 C76.1@98.311,46.675 ; v1(101.925,131.6) 101.925,133.475 101.15,134.25 C27.2@100.175,134.25 C28.1@98.311,134.25 ; v1(102.05,102.775) 102.05,104.65 101.275,105.425 C35.2@100.3,105.425 C36.1@98.436,105.425
VGAN: C9.2 C10.2 C13.2 C14.2 C17.2 C18.2 C21.2 C22.2 C29.2 C30.2 C33.2 C34.2 C37.2 C38.2 C41.2 C42.2 C49.2 C50.2 C53.2 C54.2 C57.2 C58.2 C61.2 C62.2 C69.2 C70.2 C73.2 C74.2 C77.2 C78.2 C81.2 C82.2 GaN1.1 GaN2.1 GaN3.1 GaN4.1 GaN5.1 GaN6.1 GaN7.1 GaN8.1 GaN9.1 GaN10.1 GaN11.1 GaN12.1 GaN13.1 GaN14.1 GaN15.1 GaN16.1 SMA1.1 | length 508.5
  Top Layer w0.5: SMA1.1@57.525,29.725 57.675,29.575 61.05,29.575 63.025,27.6 94.4,27.6 v1(96.75,29.95) ; C53.2@92.525,61.55 C54.2@94.475,61.55 ; C49.2@92.575,75.55 C50.2@94.525,75.55 ; C61.2@92.65,32.725 C62.2@94.6,32.725 ; C13.2@92.65,120.3 C14.2@94.6,120.3 ; C57.2@92.7,46.725 C58.2@94.65,46.725 ; C9.2@92.7,134.3 C10.2@94.65,134.3 ; C21.2@92.775,91.475 C22.2@94.725,91.475 ; C17.2@92.825,105.475 C18.2@94.775,105.475 ; GaN11.1@93.5,48.2 96.1,48.2 96.625,48.725 v1(96.625,58.775) 96.625,60.2 95.25,61.575 94.475,61.575 94.475,61.975 GaN10.1@93.5,62.95 95.95,62.95 96.625,63.625 v1(96.625,72.85) 96.625,74.275 95.325,75.575 94.525,75.575 94.525,75.975 GaN9.1@93.55,76.95 95.9,76.95 96.875,77.925 v1(96.875,88.7) 96.875,90.125 95.5,91.5 94.725,91.5 94.725,91.9 GaN4.1@93.75,92.875 96.2,92.875 96.875,93.55 v1(96.875,102.775) 96.875,104.2 95.575,105.5 94.775,105.5 94.775,105.9 GaN3.1@93.8,106.875 ; GaN3.1@93.625,106.95 96.225,106.95 96.75,107.475 v1(96.75,117.525) 96.75,118.95 95.375,120.325 94.6,120.325 94.6,120.725 GaN2.1@93.625,121.7 96.075,121.7 96.75,122.375 v1(96.75,131.6) 96.75,133.025 95.45,134.325 94.65,134.325 94.65,134.725 GaN1.1@93.675,135.7 95.6,135.7 96.7,136.8 96.7,144.525 97.75,145.575 100.85,145.575 115.925,130.5 115.925,43.025 102.85,29.95 v1(96.75,29.95) ; GaN11.1@93.675,48.125 94.65,47.15 94.65,46.75 95.45,46.75 96.75,45.45 v1(96.75,44.025) 96.75,34.8 96.075,34.125 GaN12.1@93.625,34.125 94.6,33.15 94.6,32.75 95.375,32.75 96.75,31.375 v1(96.75,29.95)
  Bottom Layer w0.5: C73.2@92.575,69.875 94.55,69.875 C74.2@94.575,69.9 ; C69.2@92.625,83.875 94.6,83.875 C70.2@94.625,83.9 ; C81.2@92.7,41.05 94.675,41.05 C82.2@94.7,41.075 ; C33.2@92.7,128.625 94.675,128.625 C34.2@94.7,128.65 ; C29.2@92.75,142.625 94.725,142.625 C30.2@94.75,142.65 ; C77.2@92.75,55.05 94.725,55.05 C78.2@94.75,55.075 ; C41.2@92.825,99.8 94.8,99.8 C42.2@94.825,99.825 ; C37.2@92.875,113.8 94.85,113.8 C38.2@94.875,113.825 ; GaN14.1@93.5,68.475 94.575,69.55 C74.2@94.575,69.875 ; GaN14.1@93.55,68.4 95.925,68.4 96.625,67.7 v1(96.625,58.775) 96.625,55.875 95.818,55.068 C78.2@94.75,55.068 ; GaN16.1@93.625,39.65 94.7,40.725 C82.2@94.7,41.05 ; GaN16.1@93.675,39.575 96.05,39.575 96.6,39.025 96.6,30.1 v1(96.75,29.95) ; C74.2@94.55,69.85 95.6,69.85 96.625,70.875 v1(96.625,72.85) 96.625,81.775 95.925,82.475 GaN13.1@93.55,82.475 94.625,83.55 C70.2@94.625,83.875 95.625,83.875 96.875,85.125 v1(96.875,88.7) 96.875,97.625 96.175,98.325 GaN8.1@93.75,98.4 94.825,99.475 C42.2@94.825,99.8 ; C82.2@94.675,41.025 95.725,41.025 96.75,42.05 v1(96.75,44.025) 96.6,44.175 96.6,53.1 96.05,53.65 GaN15.1@93.675,53.65 94.75,54.725 C78.2@94.75,55.05 ; C34.2@94.675,128.6 95.725,128.6 96.75,129.625 v1(96.75,131.6) 96.75,140.525 96.05,141.225 GaN5.1@93.675,141.225 94.75,142.3 C30.2@94.75,142.625 ; C34.2@94.7,128.625 94.7,128.3 GaN6.1@93.625,127.225 96.05,127.15 96.75,126.45 v1(96.75,117.525) 96.75,114.625 95.943,113.818 C38.2@94.875,113.818 ; C42.2@94.8,99.775 95.85,99.775 96.875,100.8 v1(96.875,102.775) 96.725,102.925 96.725,111.85 96.175,112.4 GaN7.1@93.8,112.4 94.875,113.475 C38.2@94.875,113.8
pads on no net: LDO1.7 LDO1.8 P1.11 P1.21 P1.22 P1.29 SMA1.Sh1 SMA1.Sh2 SMA1.Sh3 SMA1.Sh4 SMA2.Sh1 SMA2.Sh2 SMA2.Sh3 SMA2.Sh4

## Polygon pours and split planes (outlines as drawn)
GND on Bottom Layer "Bot_GND" (solid, remove dead copper, pour order 5): 25.375,26.4 25.375,142.175 29.65,146.45 112.85,146.45 117.1,142.2 117.05,142.15 117.05,28.525 112.65,24.125 27.65,24.125
GND on Top Layer "Top_GND" (solid, remove dead copper, pour order 2): 25.425,26.35 25.425,142.175 29.725,146.475 112.875,146.475 117.125,142.225 117.075,142.175 117.075,28.3 112.8,24.025 27.75,24.025

## Silkscreen, mask and mechanical layers (free items; w line width, h text height)
Top Overlay:
  text "Summer 2018" at 53.075,144.075 h1.52 r180
  text "ICSP _ CWRU" at 58.85,140.55 h1.52 r180
  text "Pumpkin" at 47.65,84.85 h1.52 r180
  text "Stupidd" at 58.6,84.7 h1.52 r180
Mechanical 1:
  lines w0.254: 112.875,23.525 ccw(c112.975,28.175) 117.625,28.075 117.625,142.525 ccw(c113.2,142.525) 113.2,146.95 29.35,146.95 ccw(c29.35,142.525) 24.925,142.525 24.925,26.175 ccw(c27.525,26.125) 27.475,23.525 112.9,23.525

## Dimensions
24,22.875 to 24,148.675 on Top Overlay
118.9,22.875 to 24,22.875 on Top Overlay

## Text inside footprints (layer, text, board x,y; h text height)
P1: Top Overlay "39" at 110.533,113.867 h0.6 r90; Top Overlay "40" at 107.993,113.867 h0.6 r90; Top Overlay "2" at 107.993,61.035 h0.6 r90; Top Overlay "1" at 110.533,61.035 h0.6 r90